# EAGLE board LiPo-BoardV1 (EAGLE 9.2.2)
ERSTELLER: Jakob Holz; PROJEKT: LiPo-Baord; VERSION: 1.1
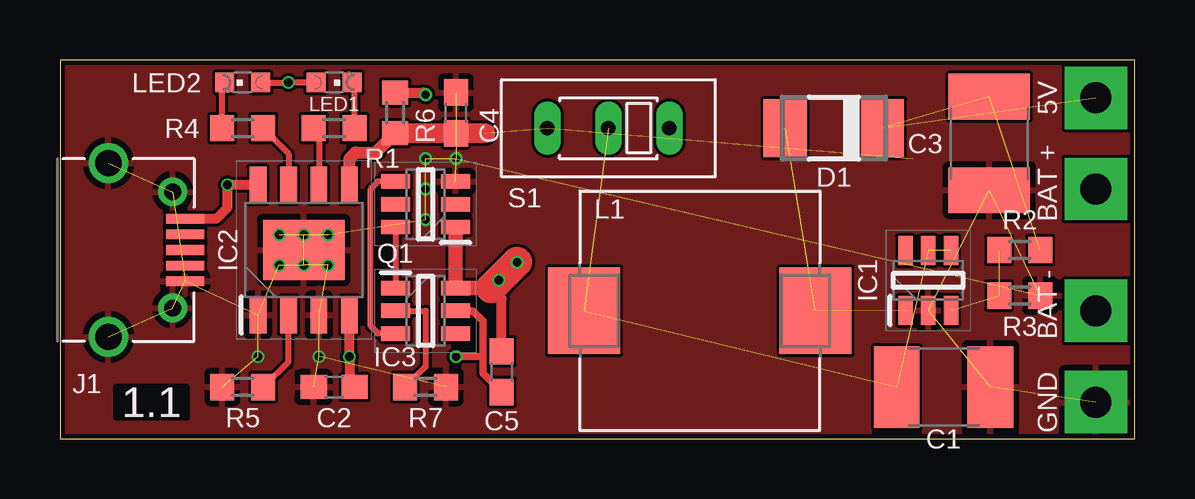
[diagram p0: board, top side]
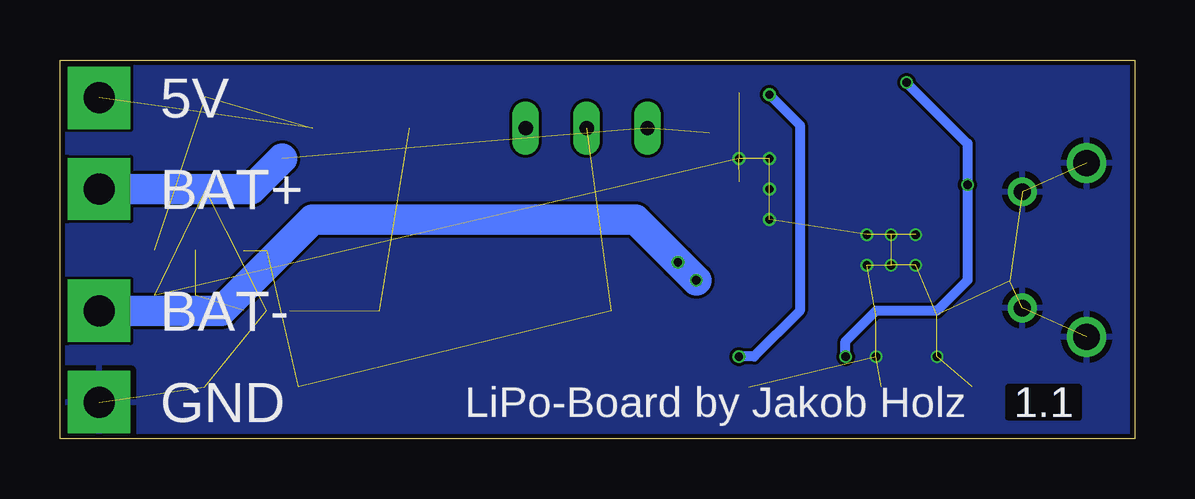
[diagram p1: board, bottom side, seen from below]

Size 44.81 x 15.8 mm. Coordinates in mm from the lower left corner, seen from the top.
Outline: 0,0 44.81,0 44.81,15.8 0,15.8 0,0
Copper layers (1*16): Top 0.035mm / dielectric 1.5mm / Bottom 0.035mm
Design rules "JLC 2Layers": minimum track width 5mil, minimum drill 0.3mm, track to track 5mil, track to pad 5mil, pad to pad 5mil, via to via 5mil, smd to smd 5mil, copper to edge 0.2mm, drill to drill 6mil, minimum pad ring 10mil, minimum via ring 3mil, stop-mask expansion 4mil, vias tented up to drill 0mil, thermal gap 10mil

## Footprints (pad centres in the part's own frame; a part is rotated, then mirrored left to right if it is on the bottom)
C1812 = smd 1.9 x 3.4: 1 -1.95,0; 2 1.95,0
C0603 = smd 1.1 x 1: 1 -0.85,0; 2 0.85,0
DO-214AC = smd 1.8 x 2.4: A 2.025,0; C -2.025,0
SOT-23-6 = smd 1.2 x 0.6: 1 -1.25,0.95; 2 -1.25,0; 3 -1.25,-0.95; 4 1.25,-0.95; 5 1.25,0; 6 1.25,0.95
SOP-8 = smd 1.525 x 0.7: 1 -2.712,1.905; 2 -2.712,0.635; 3 -2.712,-0.635; 4 -2.712,-1.905; 5 2.712,-1.905; 6 2.712,-0.635; 7 2.712,0.635; 8 2.712,1.905 | smd 2.513 x 3.402: 9 0,0
MICROUSB = smd 0.4 x 1.6: 1 1.3,-2.68; 2 0.65,-2.68; 3 0,-2.68; 4 -0.65,-2.68; 5 -1.3,-2.68 | drill 1.1: MP1 -3.625,0.521; MP4 3.625,0.521 | drill 0.7: MP2 -2.425,-2.159; MP3 2.425,-2.159
CON-PAD = drill 1.3 pad 2.6 square: 1 0,0
INDUCTOR10.8X10 = smd 3 x 3.6: 1 -4.826,0; 2 4.826,0
CHIPLED_0603 = smd 0.8 x 0.8: A 0,-0.75; C 0,0.75
R0603 = smd 1 x 1.1: 1 -0.85,0; 2 0.85,0
SPDT = drill 0.6 long: 1 -2.54,0; 2 0,0; 3 2.54,0

## Placement (x,y rotation side)
C1  22uF  [C1812]  36.83,2.16 0 top
C2  10uF  [C0603]  11.43,2.16 180 top
C3  22uF  [C1812]  38.73,12.32 270 top
C4  10uF  [C0603]  16.51,13.59 90 top
C5  100n  [C0603]  18.41,2.79 90 top
D1  SS34  [DO-214AC]  32.26,12.95 180 top
IC1  MT3608  [SOT-23-6]  36.2,6.6 90 top
IC2  TP4056  [SOP-8]  10.16,7.87 90 top
IC3  FS312F-G  [SOT-23-6]  15.24,5.33 0 top
J1  MICRO_USB  [MICROUSB]  2.54,7.87 90 top
J2  5V  [CON-PAD]  43.18,14.22 180 top
J3  GND  [CON-PAD]  43.18,1.52 180 top
J4  BAT +  [CON-PAD]  43.18,10.41 180 top
J5  BAT -  [CON-PAD]  43.18,5.33 180 top
L1  SLO1040H220MTT  [INDUCTOR10.8X10]  26.67,5.33 0 top
LED1  GREEN  [CHIPLED_0603]  11.43,14.86 270 top
LED2  RED  [CHIPLED_0603]  7.62,14.86 90 top
Q1  FS8205  [SOT-23-6]  15.24,9.78 180 top
R1  1k  [R0603]  11.43,12.95 0 top
R2  7k5  [R0603]  40.01,7.87 0 top
R3  1k  [R0603]  40.01,5.97 180 top
R4  1k  [R0603]  7.62,12.95 180 top
R5  1k2  [R0603]  7.62,2.16 0 top
R6  100R  [R0603]  13.97,13.59 90 top
R7  1k  [R0603]  15.24,2.16 180 top
S1  SPDT  [SPDT]  22.86,12.95 0 top

## Library data of the parts
C1 C3 = resistor
C2 C4 C5 = rcl; SPICEPREFIX: C
D1 = diode
IC1 = Jakobs_LBR; DESCRIPTION: High Efficiency 1.2MHz 2A Step Up Converter; HEIGHT: 1.45mm; MANUFACTURER_NAME: Aerosemi; MANUFACTURER_PART_NUMBER: MT3608
IC2 = Jakobs_LBR; DESCRIPTION: 1A Standalone Linear Li-lon Battery Charger, SOP-8; HEIGHT: 1.75mm; MANUFACTURER_NAME: NanJing Top Power; MANUFACTURER_PART_NUMBER: TP4056
IC3 = Jakobs_LBR; DESCRIPTION: One Cell Lithium-ion/Polymer Battery Protection IC; HEIGHT: 1.45mm; MANUFACTURER_NAME: Fortune Semiconductor Corporation; MANUFACTURER_PART_NUMBER: FS312F-G
J1-J5 S1 = Jakobs_LBR
L1 = Jakobs_LBR; DC_CURRENT: 4A; DC_RESISTANCE: 66mΩ; INDUCTANCE: 22uH; SATURATION_CURRENT: 5.5A
LED1 LED2 = led
Q1 = Jakobs_LBR; DESCRIPTION: DUAL N-CHANNEL ENHANCEMENT MODE POWER MOFSET; HEIGHT: 1mm; MANUFACTURER_NAME: Fortune Semiconductor Corporation; MANUFACTURER_PART_NUMBER: FS8205
R1-R7 = rcl; SPICEPREFIX: R

## Nets
5V: C3.1 D1.C J2.1 R2.2
BAT+: C4.1 IC2.5 J4.1 R6.1 S1.1
BAT-: C5.2 IC3.6 J5.1 Q1.1
GND: C1.2 C2.2 C3.2 C4.2 IC1.2 IC2.1 IC2.3 IC2.9 J1.5 J1.MP1 J1.MP2 J1.MP3 J1.MP4 J3.1 Q1.3 R3.1 R5.1 R7.1
N$1: D1.A IC1.1 L1.2
N$2: LED1.C R1.2
N$3: LED2.C R4.2
N$4: IC2.7 R4.1
N$5: IC2.6 R1.1
N$6: IC1.3 R2.1 R3.2
N$7: IC2.2 R5.2
N$10: IC3.1 Q1.6
N$11: IC3.3 Q1.4
N$12: IC3.2 R7.2
N$13: C5.1 IC3.5 R6.2
VBUS: C2.1 IC2.4 IC2.8 J1.1 LED1.A LED2.A
VIN: C1.1 IC1.4 IC1.5 L1.1 S1.2

## Tracks (layer width: path | path; a pad name or v marks a point on that pad's centre or on a via)
5V  (3 unrouted)
BAT+  (2 unrouted)
  Top 0.508: IC2.5 12.06,11.68 12.32,11.94 13.17,11.94 R6.1
  Top 0.813: R6.1 C4.1 17.74,12.74
  Bottom 1.27: 35.56,11.68 36.83,10.41 J4.1
BAT-  (via drill 0.35)
  Top 0.406: C5.2 18.41,5.84 17.97,6.28
  Top 0.61: Q1.1 IC3.6 17.97,6.28
  Top 1.27: v19.05,7.37 v18.29,6.6 17.97,6.28
  Bottom 1.27: J5.1 38.1,5.33 34.29,9.14 20.83,9.14 v19.05,7.37 v18.29,6.6
GND  (via drill 0.35)  (29 unrouted)
  other vias: 9.14,8.51 10.16,8.51 11.18,8.51 9.14,7.24 10.16,7.24 11.18,7.24 15.24,9.14 15.24,10.41 8.26,3.43 15.24,11.68 16.51,11.68 10.79,3.43
  pour Top (rank 2): 0,16.76 45.72,16.76 45.72,-1.02 0,-1.02
  pour Bottom: 0,16.76 45.72,16.76 45.72,-1.02 0,-1.02
  pour Top: 10.16,6.6 11.43,6.6 11.43,5.33 10.16,5.33
  pour Top: 7.62,6.6 8.89,6.6 8.89,5.33 7.62,5.33
N$1  (2 unrouted)
N$2
  Top 0.254: R1.2 12.28,14.76 LED1.C
N$3
  Top 0.254: R4.2 6.77,14.76 LED2.C
N$4
  Top 0.254: R4.1 9.53,11.9 IC2.7
N$5
  Top 0.254: R1.1 10.79,12.74 IC2.6
N$6  (2 unrouted)
N$7
  Top 0.254: R5.2 9.53,3.21 IC2.2
N$10
  Top 0.254: Q1.6 IC3.1
N$11
  Top 0.254: Q1.4 13.27,10.73 12.95,10.41 12.95,4.7 13.27,4.38 IC3.3
N$12
  Top 0.254: IC3.2 15.24,5.33 15.24,3.01 R7.2
N$13  (via drill 0.35)
  Top 0.305: IC3.5 17.2,5.33 17.64,4.9 17.64,3.43 | C5.1 17.64,2.72 17.64,3.43 | v16.51,3.43 17.64,3.43
  Top 0.406: R6.2 15.15,14.44 v15.24,14.35
  Bottom 0.406: v15.24,14.35 13.97,13.08 13.97,5.33 15.88,3.43 v16.51,3.43
VBUS  (via drill 0.35)
  Top 0.254: LED1.A v9.53,14.86 LED2.A
  Top 0.406: IC2.8 v6.99,10.59 6.99,9.65 6.51,9.17 J1.1 | IC2.4 v12.06,3.43 12.06,2.37 C2.1
  Bottom 0.406: v12.06,3.43 12.06,4.06 10.79,5.33 8.26,5.33 6.99,6.6 v6.99,10.59 6.99,12.32 v9.53,14.86
VIN  (4 unrouted)

## Text on the board
bNames: 5V | BAT+ | BAT- | GND | LiPo-Board by Jakob Holz